# Altium PCB PIC16_SERVO_DS1307_STEP.PcbDoc
Units mm, origin at the board's own origin, x right, y up, seen from the top; angles counter-clockwise.
Board outline 146.43 x 72.77 mm, 2 copper layers (Top Layer, Bottom Layer); 37 components, 35 nets, 160 pads, 34 vias.
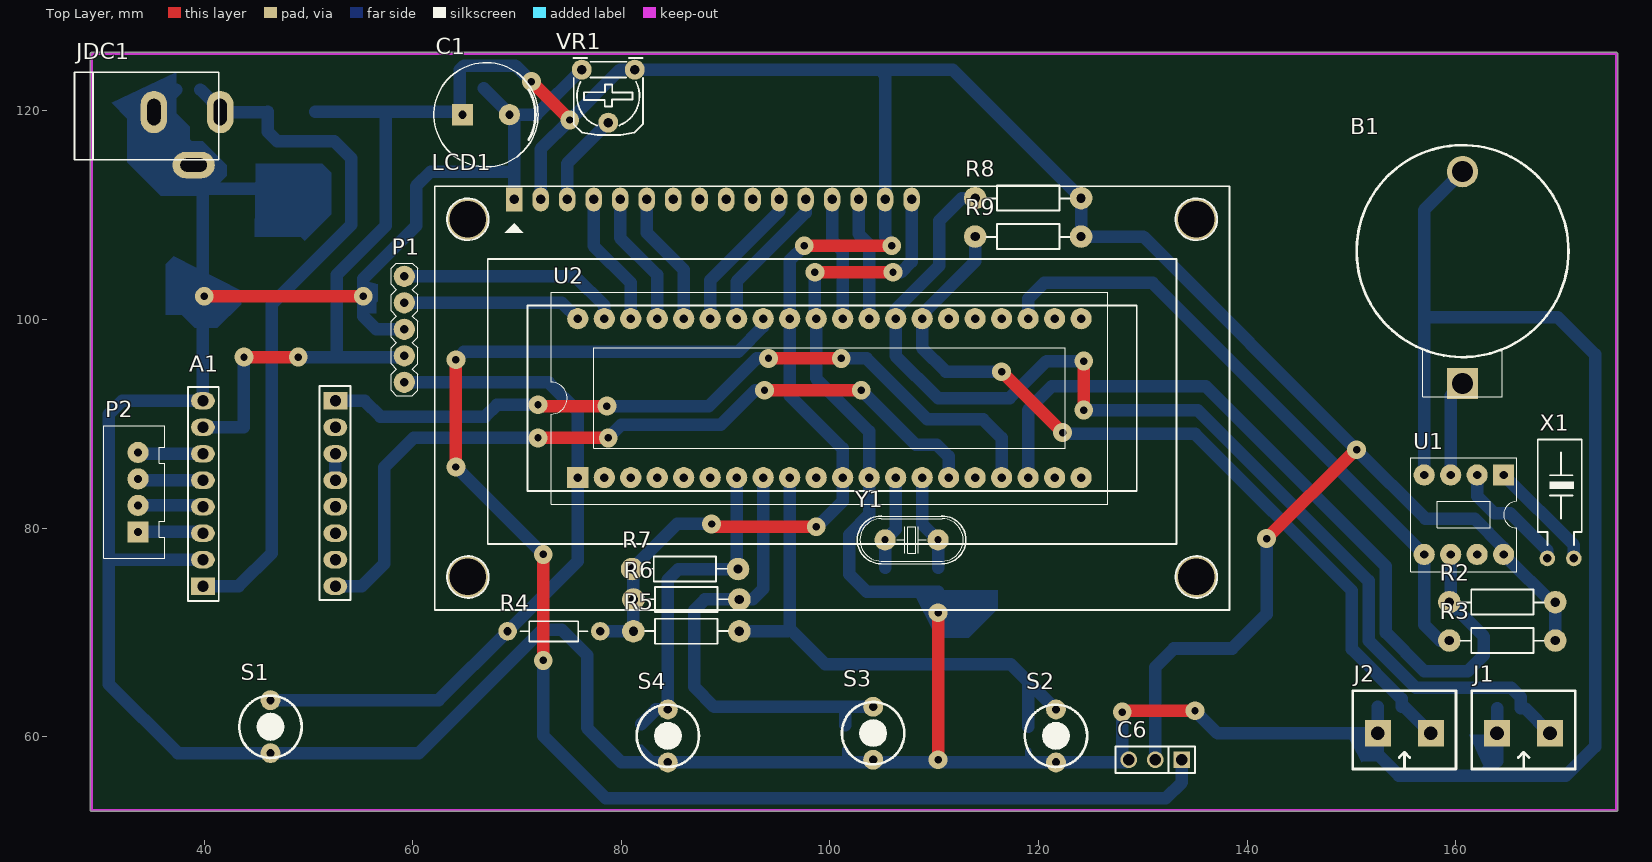
[diagram p0: Top Layer view]
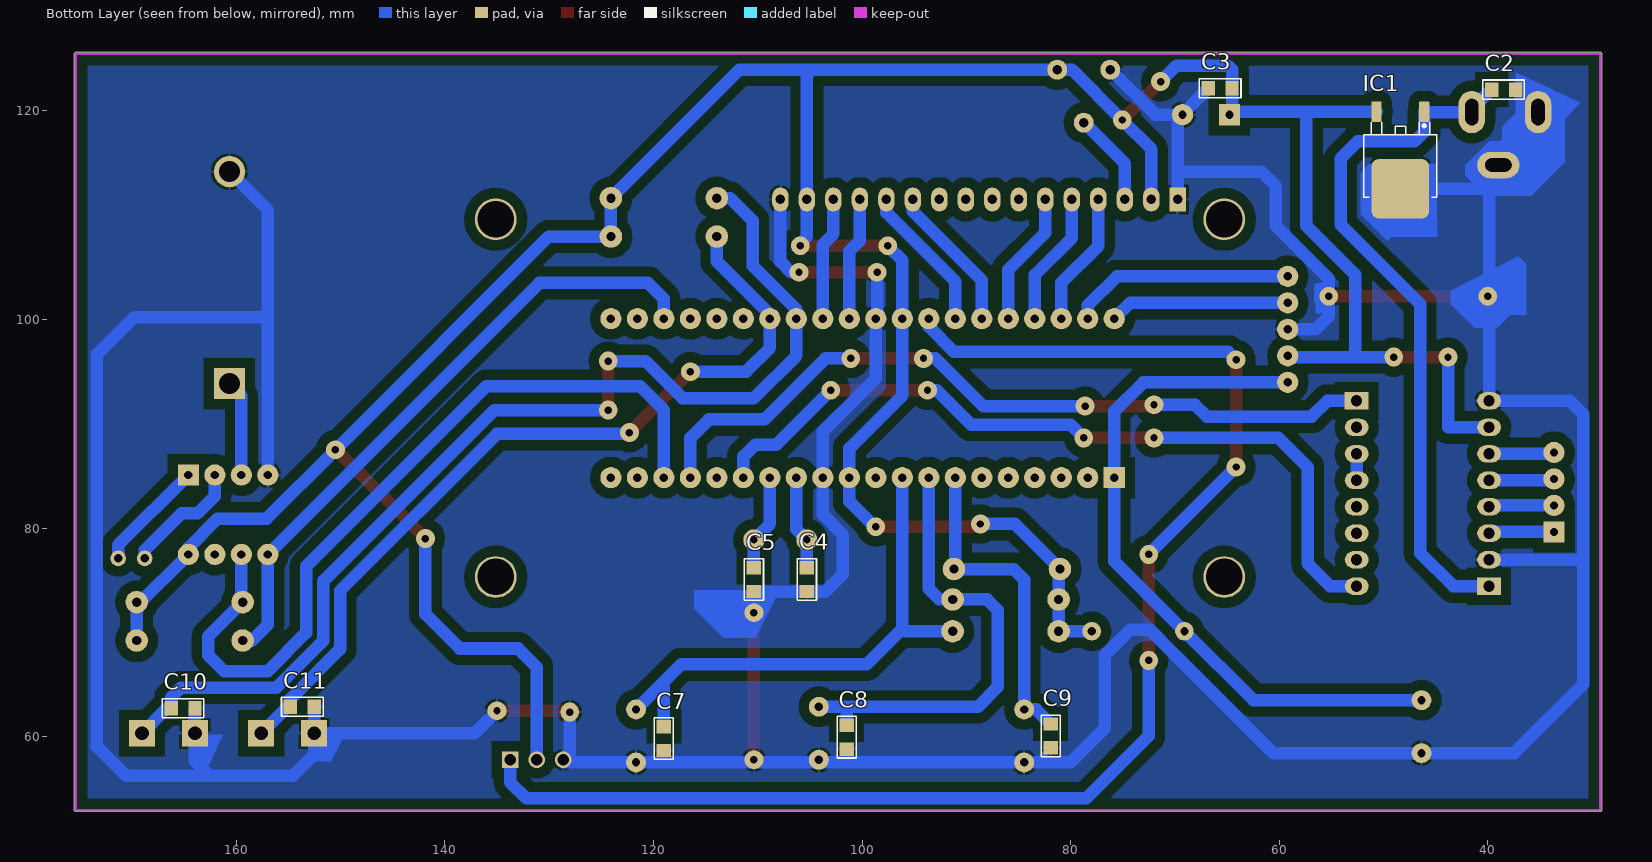
[diagram p1: Bottom Layer view, seen from below]
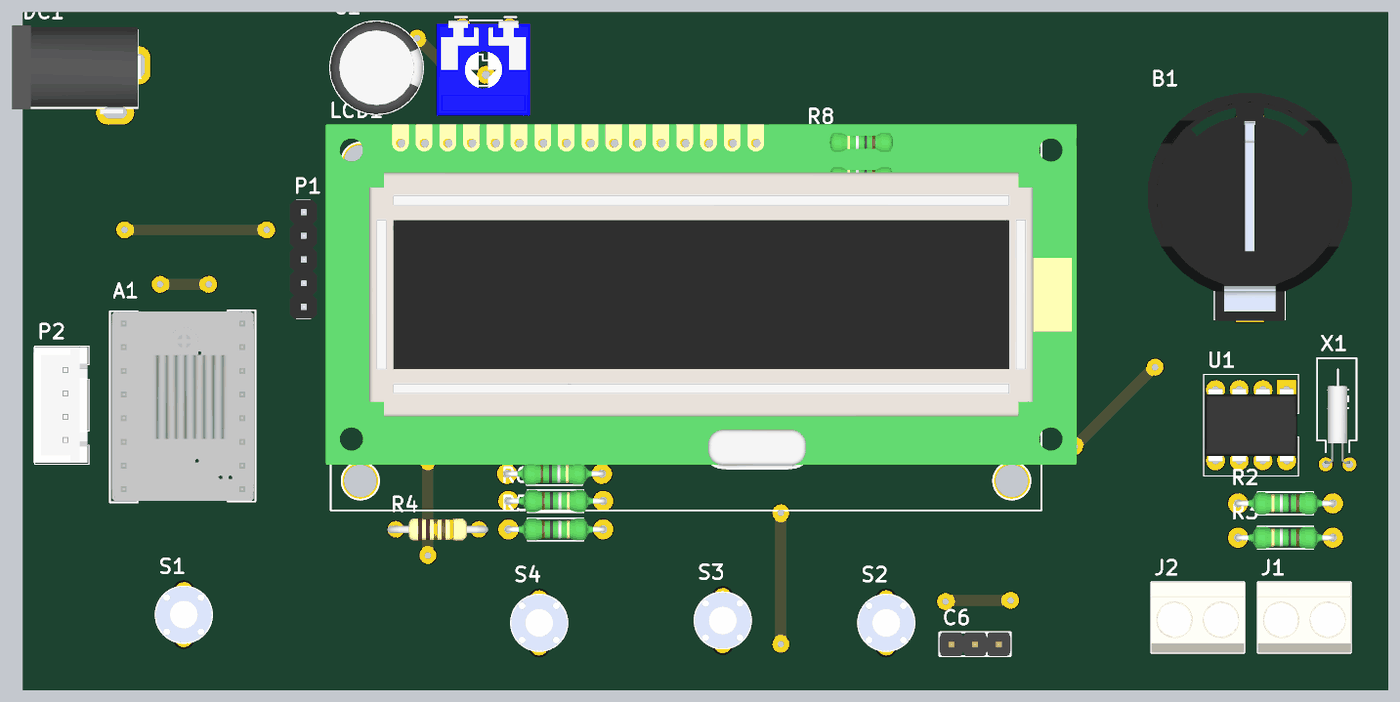
[diagram p2: 3D render of the assembled board from above, using the file's embedded part models]
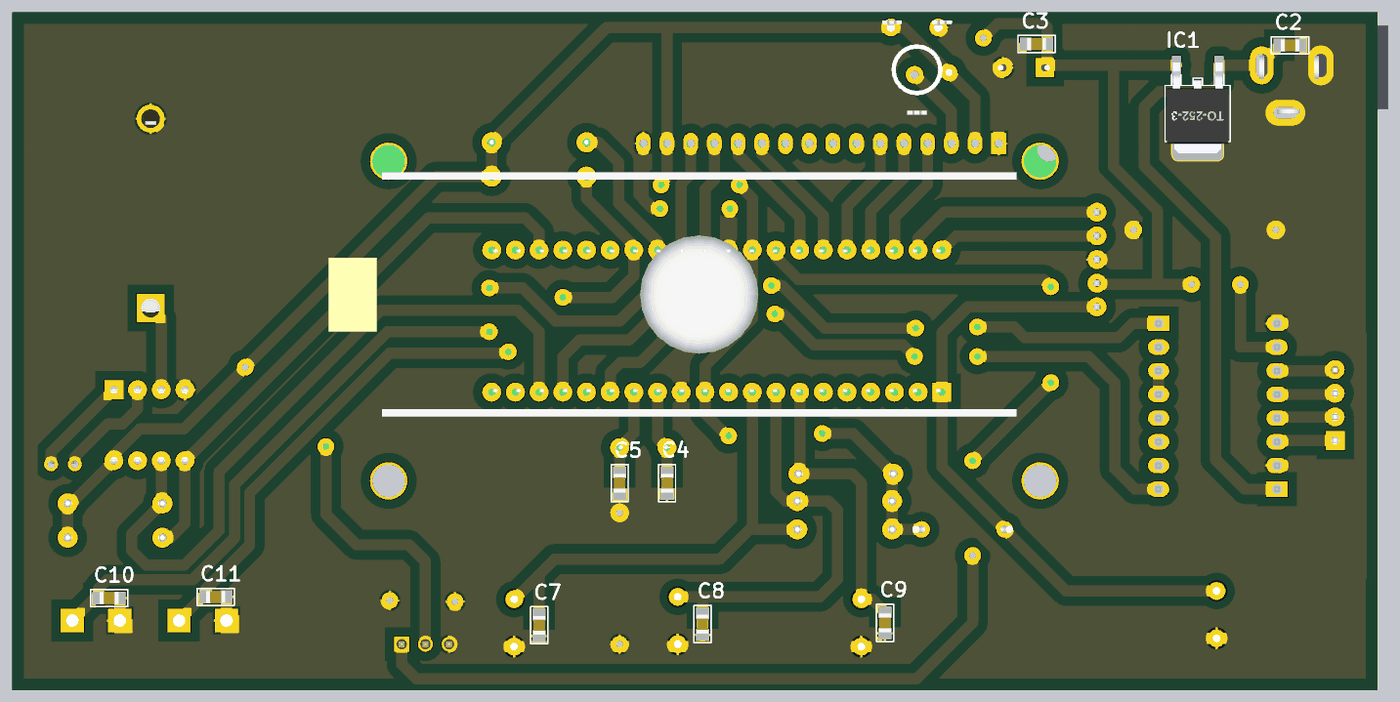
[diagram p3: 3D render of the assembled board from below, using the file's embedded part models]

## Layer stack, top to bottom
Top Solder: solder mask 0.0102, Solder Resist, Dk 3.5
Top Layer: signal copper 0.0356
Dielectric 1: dielectric 0.32, FR-4, Dk 4.8
Bottom Layer: signal copper 0.0356
Bottom Solder: solder mask 0.0102, Solder Resist, Dk 3.5

## Board outline
29.083,52.959 29.083,125.476 cw(c29.21,125.476) 29.21,125.603 175.387,125.603 cw(c175.387,125.476) 175.514,125.476 175.514,52.959 cw(c175.387,52.959) 175.387,52.832 29.21,52.832 cw(c29.21,52.959)

## Design rules (kind name [scope] priority, off if disabled: settings)
Clearance [All] p1: gap=0.25 ignorepadtopadclearanceinfootprint=FALSE
PolygonConnect [All] p1: connectstyle=Relief reliefconductorwidth=0.254 reliefentries=4 polygonreliefangle="90 Angle" airgapwidth=0.254
RoutingVias [All] p1: holewidth=0.711 width=1.8 viastyle="Through Hole" minholewidth=0.711 minwidth=1.8 maxholewidth=0.711 maxwidth=1.8
SolderMaskExpansion [All] p1: expansion=0.102
Width [All] p1: maxlimit=1.2 minlimit=0.4 preferedwidth=0.6
30 further rules are at their usual default settings.

## Components (designator, comment, footprint, x,y, rotation, side; value= is the part's Value field where it differs from the comment)
A1 "A4988" A4988 54.356,74.295 r90 top
B1 "3V3" PIN_CMOS 160.655,106.553 r90 top
C1 "1000uF/25V" "CAP 1000uF/25V" 67.02,119.634 r0 top
C2 "103" SM-0805 38.481,122.047 r180 bottom
C3 "103" SM-0805 65.659,122.174 r0 bottom
C4 "103" SM-0805 105.283,75.057 r270 bottom
C5 "103" SM-0805 110.363,75.057 r270 bottom
C6 "JP3" JP3-D1T 133.731,57.785 r180 top
C7 "103" SM-0805 118.999,59.817 r270 bottom
C8 "103" SM-0805 101.473,59.944 r270 bottom
C9 "103" SM-0805 81.915,60.071 r270 bottom
C10 "103" SM-0805 165.1,62.738 r180 bottom
C11 "103" SM-0805 153.67,62.865 r180 bottom
IC1 "LM78xx" TO252-123 48.387,116.222 r0 bottom
J1 "KF2" KF2-5.08 166.497,60.325 r180 top
J2 "KF2" KF2-5.08 155.067,60.325 r180 top
JDC1 "Jac DC" DC0 38.354,117.348 r0 top
LCD1 "LCD 16x2A" LCD16X2 69.723,111.506 r0 top value=LCD16x2A
P1 "HD5" "JUMP 5" 59.182,104.14 r270 top
P2 "HD4" "HEADER 4" 33.655,79.629 r90 top
R2 "10k" RES-1/4W 164.846,72.771 r0 top
R3 "10k" RES-1/4W 164.846,69.088 r0 top
R4 "1k" R1/4W 77.978,70.104 r180 top value="R1/4W - 1K"
R5 "10k" RES-1/4W 85.852,70.231 r180 top
R6 "10k" RES-1/4W 85.852,73.279 r180 top
R7 "10k" RES-1/4W 85.725,76.2 r180 top
R8 "10k" RES-1/4W 119.38,111.506 r0 top
R9 "10k" RES-1/4W 119.38,107.823 r0 top
S1 "SW" "BUTTON  ROUND" 46.355,60.96 r90 top
S2 "SW" "BUTTON  ROUND" 121.666,60.071 r270 top
S3 "SW" "BUTTON  ROUND" 104.14,60.325 r270 top
S4 "SW" "BUTTON  ROUND" 84.455,60.071 r270 top
U1 "DS1307" "DIP 8" 164.592,85.09 r180 top
U2 "PIC16F877A" "DIP 40" 75.819,84.836 r0 top
VR1 "10K" VR 81.28,123.952 r180 top value="VR 10K"
X1 "32.768k" XT32k 168.783,77.089 r90 top value=4Mhz
Y1 "XTAL" XTAL 107.823,78.867 r0 top

## Footprints (in the part's own frame and the unit in brackets; to place one, negate y for a bottom-side part, rotate by r counter-clockwise, add the part's x,y. Pads: shape width x height; smd on the part's side, far side on the other; paste and mask are expansions set on the pad)
A4988 [mil]
  oval 65x90 hole 42: 1(5,70) 2(105,70) 3(205,70) 4(305,70) 5(405,70) 6(505,70) 7(605,70) 9(705,570) 10(605,570) 11(505,570) 12(405,570) 13(305,570) 14(205,570) 15(105,570)
  rect 65x90 hole 42: 8(705,70) 16(5,570)
  silkscreen extent -51,13 761,627, body extent -45,19 755,619, height 395
"BUTTON  ROUND" [mm]
  round 1.905 / inner round 1.524 / far side round 1.905 hole 0.8 mask+0.205: 1(-2.54,0) 2(2.54,0)
  silkscreen extent -3,-2.99 2.98,2.99, body extent -3,-3 3,3, height 4.5
"CAP 1000uF/25V" [mm]
  rect 2.032x2.032 hole 0.8: 1(-2.25,0)
  round 2.032 hole 0.8: 2(2.25,0)
  silkscreen extent -5,-5 5,5, body extent -5,-5 5.01,5, height 16.01
DC0 [mil] "Jac DC input"
  oval 100x160 hole 50 slot 100 at 90 deg: 1(125,100) 2(-125,100)
  oval 160x100 hole 50 slot 100 at 0 deg: 3(25,-100)
  silkscreen extent -425,-80 120,250, body extent -410,-105 134,269, height 434
"DIP 8" [mil]
  rect 80x80 hole 31.5: 1(0,0)
  round 80 hole 31.5: 2(100,0) 3(200,0) 4(300,0) 5(300,300) 6(200,300) 7(100,300) 8(0,300)
  silkscreen extent -50,-65 350,365, body extent -45,-4 345,304, height 190
"DIP 40" [mil]
  rect 80x80 hole 31.5: 1(0,0)
  round 80 hole 31.5: 2(100,0) 3(200,0) 4(300,0) 5(400,0) 6(500,0) 7(600,0) 8(700,0) 9(800,0) 10(900,0) 11(1000,0) 12(1100,0) 13(1200,0) 14(1300,0) 15(1400,0) 16(1500,0) 17(1600,0) 18(1700,0) 19(1800,0) 20(1900,0) 21(1900,600) 22(1800,600) 23(1700,600) 24(1600,600) 25(1500,600) 26(1400,600) 27(1300,600) 28(1200,600) 29(1100,600) 30(1000,600) 31(900,600) 32(800,600) 33(700,600) 34(600,600) 35(500,600) 36(400,600) 37(300,600) 38(200,600) 39(100,600) 40(0,600)
  silkscreen extent -100,-100 2000,700, body extent -34,0 1934,602, height 227
"HEADER 4" [mil]
  rect 80x80 hole 31.5: 1(0,0)
  round 80 hole 31.5: 2(100,0) 3(200,0) 4(300,0)
  silkscreen extent -100,-100 400,130, body extent -94,-92 394,134, height 276
JP3-D1T [mm] "3 pins, 1 row, straight, gold plating"
  rect 1.6x1.6 hole 1.1: 1(0,0)
  round 1.6 hole 1.1: 2(2.54,0) 3(5.08,0)
  silkscreen extent -1.27,-1.27 6.35,1.27, body extent -1.27,-1.27 6.35,1.27, height 8.54
"JUMP 5" [mil]
  round 80 hole 31.5: 1(0,0) 2(100,0) 3(200,0) 4(300,0) 5(400,0)
  silkscreen extent -50,-50 450,50, body extent -50,-58 450,57, height 335
KF2-5.08 [mm]
  rect 2.5x2.5 hole 1.3: 1(-2.54,0) 2(2.54,0)
  silkscreen extent -4.95,-4.08 4.95,3.43, body extent -5,-4.07 5,3.43, height 10
LCD16X2 [mil] "LCD dipslay 16x2, 16 pin"
  rect 62x90 hole 36: 1(0,0)
  oval 62x90 hole 36: 2(100,0) 3(200,0) 4(300,0) 5(400,0) 6(500,0) 7(600,0) 8(700,0) 9(800,0) 10(900,0) 11(1000,0) 12(1100,0) 13(1200,0) 14(1300,0) 15(1400,0) 16(1500,0)
  round 157.48 hole 137.8: "Hole 0"(-175,-1425) "Hole 0"(-175,-75) "Hole 0"(2575,-1425) "Hole 0"(2575,-75)
  silkscreen extent -300,-1550 2700,50, body extent -321,-1357 2849,81, height 414
PIN_CMOS [mm]
  rect 3x3 hole 2: 1(-12.7,0)
  round 3 hole 2: 2(7.62,0)
  silkscreen extent -13.97,-10.16 10.16,10.16, body extent -14.09,-11 10.41,11, height 8.5
R1/4W [mil] "R 1/4W, 2 Pin, 350mil"
  round 70 hole 31: 1(0,0) 2(350,0)
  silkscreen extent 48,-38 302,38, body extent -40,-47 386,47, height 111
RES-1/4W [mil]
  round 85 hole 35: 1(-215,5) 2(185,5)
  silkscreen extent -173,-42 141,52, body extent -227,-42 197,52, height 95
SM-0805 [mil] "Compoment SMD 80x50mil"
  rect 50x55 smd: 1(-45,0) 2(45,0)
  silkscreen extent -78,-36 78,36, body extent -40,-25 40,25, height 24
TO252-123 [mm]
  round 0.5 on Mech15: 0(0,0)
  rrect25% 1x2 smd: 1(-2.285,-3.7) 3(2.285,-3.7)
  rrect25% 5.5x5.7 smd: 2(0,3.7)
  silkscreen extent -3.5,-2.7 3.5,4.5, body extent -3.3,-3.95 3.3,5.76, height 2.31
VR [mil] "Resistor Variable"
  round 75 hole 35: 1(0,0) 2(100,200) 3(200,0)
  silkscreen extent -31,-44 231,246, body extent -87,-30 307,372, height 165
XT32k [mm] "Crystal 32k, 2 pin, real timer for DS1307"
  round 1.5 hole 0.813: 1(0,0) 2(0,-2.54)
  silkscreen extent 1.27,-3.3 11.4,0.91, body extent 0.07,-2.64 8.45,0.14, height 2.04
XTAL [mil]
  round 80 hole 27.56: 1(-100,0) 2(100,0)
  silkscreen extent -205,-90 205,90, body extent -223,-90 223,93, height 138

## Part data
B1: library part BAT
C1: library part "CAP 1000uF/25V"
C2 C3 C4 C5 C7 C8 C9 C10 C11: library part CM, "Cap SMD"
C6: "WR-PHD 2.54 mm Angled Socket Header", Manufacturer="Würth Elektronik eiSos GmbH", partNo=613003143121, ComponentLink1 Description=Manufacturer, ComponentLink1URL=http://www.we-online.com, ComponentLink2 Description=Datasheet, ComponentLink2URL=http://katalog.we-online.de/em/datasheet/6130xx143121.pdf, Created by="Karrer Zheng", Created Date="29 March 2013", NoPins=03
IC1: "Positive Voltage Regulator", ComponentLink1Description="Manufacturer Link", ComponentLink1URL=http://www.st.com/, ComponentLink2Description=Datasheet, ComponentLink2URL=http://www.st.com/stonline/products/literature/ds/2146/l78m05c.pdf, DatasheetVersion=Apr-1994, LatestRevisionDate=17-Jul-2002, LatestRevisionNote="Re-released for DXP Platform.", Note="Tab is connected to pin 3 (GND).", PackageDescription="TO, Thru-Hole, Vertical, Heatsink Mounted; 3 In-Line Leads; Pitch 2.54 mm; Pin sequence 1, 3, 2", PackageReference=ISOWATT220AB, PackageVersion=Jul-1998, Published=24-Aug-2001, Publisher="Altium Limited"
J1 J2: Manufacturer="Würth Elektronik eiSos GmbH", partNo=691103110002, ComponentLink1 Description=Manufacturer, ComponentLink1URL=http://www.we-online.com, ComponentLink2 Description=Datasheet, ComponentLink2URL=http://katalog.we-online.de/em/datasheet/6911031100xx.pdf, Created by="Karrer Zheng", Created Date="29 October 2013", NoPins=2
JDC1: library part DCIN, "Jac DC input"
LCD1: library part LCD16x2A, "LCD dipslay 16 char, 2 line"
P1: library part "HEADER 5"
P2: library part "HEADER 4"
R2 R3 R5 R6 R7 R8 R9: library part R, "Resistor R1/4W"
R4: library part R1/4W, "Resistor 1/4W"
S1 S2 S3 S4: library part SW-Button, "Switch-Button", LatestRevisionDate=17-Jul-2002, LatestRevisionNote="Re-released for DXP Platform.", PackageReference=SPST-2, Published=24-Mar-1999, Publisher="Altium Limited"
VR1: library part VR1, "Var Resistor"
X1: library part XT2, "Crystal, 32.768 KHz, -40 to 85 degC, 3.2 x 1.5 x 0.9 mm SMD"
Y1: library part XTAL2

## Via types
v1: diameter 1.8, hole 0.711, Top Layer to Bottom Layer, 34 vias

## Nets (pads, with @x,y where several pads share a name; then routed paths per layer and width w, separated by ;. In a path a pad name is that pad's centre, name@x,y a point inside that pad or via, vN(x,y) a via of type N, cw(c..) or ccw(c..) an arc to the next point about the centre after c; other vN are vias at no path point)
12V: A1.16 C2.1 IC1.1 JDC1.1 | length 67.4
  Bottom Layer w1.2: C2.1 41.529,120.142 JDC1.1 46.068,119.888 IC1.1 ; A1.16 43.307,74.422 46.482,77.597 46.482,101.473 54.102,109.093 54.102,115.443 52.451,117.094 46.99,117.094 46.102,117.982 IC1.1 ; IC1.1@46.101,119.923 IC1.1
D4: LCD1.11 U2.35 | length 14.2
  Bottom Layer w1.2: U2.35 88.519,103.759 95.123,110.363 LCD1.11
D5: LCD1.12 U2.34 | length 14.2
  Bottom Layer w1.2: U2.34 91.059,103.632 97.663,110.236 LCD1.12
D6: LCD1.13 U2.30 | length 11.9
  Bottom Layer w1.2: LCD1.13 100.203,107.569 101.219,106.553 U2.30
D7: LCD1.14 U2.29 | length 11.9
  Bottom Layer w1.2: LCD1.14 102.743,108.204 103.759,107.188 U2.29
DIR: A1.8 U2.17 | length 73.9
  Top Layer w1.2: v1(72.009,91.821) 72.136,91.694 v1(78.613,91.694) ; v1(94.107,96.266) v1(101.092,96.266)
  Bottom Layer w1.2: A1.8 55.372,92.202 56.896,90.678 66.929,90.678 68.072,91.821 v1(72.009,91.821) ; v1(78.613,91.694) 88.392,91.694 92.964,96.266 v1(94.107,96.266) ; v1(101.092,96.266) 103.505,96.266 109.347,90.424 114.681,90.424 116.459,88.646 U2.17
DOWN: C7.1 R5.1 S2.1 U2.9 | length 52.5
  Bottom Layer w1.2: R5.1 95.885,70.104 96.139,70.358 ; U2.9 96.139,70.358 ; C7.1 118.999,65.278 ; S2.1 118.999,65.278 ; 96.139,70.358 99.568,66.929 117.348,66.929 118.999,65.278
E0: LCD1.4 U2.38 | length 12.9
  Bottom Layer w1.2: LCD1.4 77.343,107.061 80.899,103.505 U2.38
E1: LCD1.5 U2.37 | length 12.9
  Bottom Layer w1.2: LCD1.5 79.883,107.823 83.439,104.267 U2.37
E2: LCD1.6 U2.36 | length 12.9
  Bottom Layer w1.2: LCD1.6 82.423,108.331 85.979,104.775 U2.36
EN_STEP: A1.1 U2.15 | length 76.7
  Top Layer w1.2: v1(72.009,88.646) v1(78.74,88.646) ; v1(93.726,93.218) v1(102.997,93.218)
  Bottom Layer w1.2: A1.1 55.118,74.422 57.277,76.581 57.277,85.852 60.071,88.646 v1(72.009,88.646) ; v1(78.74,88.646) 80.01,89.916 89.535,89.916 92.837,93.218 v1(93.726,93.218) ; v1(102.997,93.218) 108.204,88.011 110.236,88.011 111.379,86.868 U2.15
GND: A1.9 A1.15 B1.2 C1.2 C2.2 C3.2 C4.2 C5.2 C6.3 C7.2 C8.2 C9.2 C10.2 C11.2 IC1.2 J1.2 J2.2 JDC1.2 JDC1.3 LCD1.1 LCD1.16 P1.3 S1.1 S2.2 S3.2 S4.2 U1.4 U2.12 U2.31 VR1.3 | length 493.9
  Top Layer w1.2: v1(40.005,102.235) v1(55.245,102.235) ; v1(98.552,104.521) v1(106.045,104.521) ; v1(110.363,57.785) v1(110.363,71.882) ; v1(128.016,62.357) 128.143,62.484 v1(135.001,62.484)
  Bottom Layer w0.6: C9.2 83.312,57.531 ; 101.346,57.531 101.473,57.658 C8.2 ; 118.745,57.531 118.999,57.785 C7.2
  Bottom Layer w1.2: C2.2 JDC1.2 39.878,115.189 39.878,112.268 ; A1.15 31.242,76.962 30.861,77.343 ; IC1.2 40.132,112.522 39.878,112.268 ; P1.3 56.515,99.06 55.245,100.33 v1(55.245,102.235) 55.245,103.886 60.325,108.966 60.325,112.776 61.722,114.173 69.723,114.173 ; C3.2 69.27,119.706 C1.2 ; LCD1.1 69.723,114.173 ; VR1.3 71.882,119.634 C1.2 ; v1(98.552,104.521) 98.552,100.203 U2.31 98.679,94.361 103.759,89.281 U2.12 103.759,81.28 101.854,79.375 101.854,75.565 103.505,73.914 C4.2 C5.2 v1(110.363,71.882) ; v1(106.045,104.521) 106.807,104.521 107.823,105.537 LCD1.16 ; v1(128.016,62.357) 128.016,58.42 C6.3 128.397,57.531 S2.2 118.745,57.531 101.346,57.531 S4.2 83.312,57.531 80.01,57.531 76.708,60.833 76.708,67.818 74.295,70.231 72.39,70.231 60.579,58.42 S1.1 37.465,58.42 30.861,65.024 30.861,77.343 ; v1(135.001,62.484) 137.16,60.325 J2.2 ; C11.2 J2.2 ; U1.4 156.972,100.33 ; B1.2 156.972,110.49 156.972,100.33 ; C10.2 J1.2 163.957,57.658 162.56,56.261 ; 30.861,77.343 30.861,90.932 32.131,92.202 A1.9 39.878,112.268 ; C1.2 69.723,119.181 69.723,114.173 ; J2.2 152.527,58.293 154.559,56.261 162.56,56.261 ; 156.972,100.33 157.099,100.203 169.799,100.203 173.355,96.647 173.355,59.055 170.561,56.261 162.56,56.261
MCLR: P1.5 R4.2 S1.2 U2.1 | length 67.1
  Bottom Layer w1.2: S1.2 62.484,63.5 R4.2 75.819,76.835 U2.1 75.819,91.186 73.025,93.98 P1.5
MODE: C9.1 R7.1 S4.1 U2.7 | length 31.5
  Bottom Layer w1.2: C9.1 83.312,62.611 S4.1 84.455,75.057 85.471,76.073 R7.1 91.059,76.2 U2.7
NetA1_5: A1.5 A1.6 | length 2.5
  Bottom Layer w1.2: A1.5 A1.6
NetA1_11: A1.11 P2.4 | length 6.3
  Bottom Layer w1.2: P2.4 33.782,87.122 A1.11
NetA1_12: A1.12 P2.3 | length 6.3
  Bottom Layer w1.2: P2.3 33.782,84.582 A1.12
NetA1_13: A1.13 P2.2 | length 6.3
  Bottom Layer w1.2: P2.2 39.751,82.169 A1.13
NetA1_14: A1.14 P2.1 | length 6.3
  Bottom Layer w1.2: P2.1 39.751,79.629 A1.14
NetB1_1: B1.1 U1.3 | length 9.2
  Bottom Layer w1.2: U1.3 159.512,92.71 B1.1
NetC4_1: C4.1 U2.13 Y1.1 | length 9.1
  Bottom Layer w1.2: C4.1 Y1.1 106.299,79.883 U2.13
NetC5_1: C5.1 U2.14 Y1.2 | length 9.3
  Bottom Layer w1.2: U2.14 108.839,80.391 Y1.2 C5.1
NetLCD1_3: LCD1.3 VR1.2 | length 9
  Bottom Layer w1.2: LCD1.3 74.803,114.935 VR1.2
NetU1_1: U1.1 X1.2 | length 10.8
  Bottom Layer w1.2: U1.1 171.323,78.359 X1.2
NetU1_2: U1.2 X1.1 | length 11.7
  Bottom Layer w1.2: U1.2 162.052,83.058 163.703,81.407 165.227,81.407 168.783,77.851 X1.1
PGC: P1.1 U2.39 | length 21.6
  Bottom Layer w1.2: P1.1 75.565,104.14 78.359,101.346 U2.39
PGD: P1.2 U2.40 | length 17.3
  Bottom Layer w1.2: P1.2 74.295,101.6 U2.40
SCL: R2.1 U1.6 U2.18 | length 77.8
  Bottom Layer w1.2: U2.18 118.999,91.313 121.285,93.599 136.017,93.599 153.289,76.327 153.289,69.977 156.972,66.294 161.163,66.294 162.687,67.818 162.687,69.596 R2.1 159.512,73.025 U1.6
SDA: R3.1 U1.5 U2.23 | length 61.1
  Bottom Layer w1.2: U2.23 118.999,101.981 120.523,103.505 130.937,103.505 U1.5 156.972,70.739 158.496,69.215 R3.1
SERVO: C6.1 U2.33 | length 137.6
  Top Layer w1.2: v1(64.135,85.852) v1(64.135,96.139) ; v1(72.517,67.31) v1(72.517,77.47)
  Bottom Layer w1.2: v1(64.135,85.852) v1(72.517,77.47) ; v1(64.135,96.139) 64.897,96.901 91.186,96.901 93.599,99.314 U2.33 ; v1(72.517,67.31) 72.517,60.071 78.502,54.086 132.191,54.086 133.731,55.626 C6.1
STEP: A1.7
SWITCH_1: C10.1 J1.1 R8.1 U2.28 | length 106.4
  Top Layer w1.2: v1(124.333,91.313) v1(124.333,96.012)
  Bottom Layer w1.2: R8.1 112.649,111.633 110.49,109.474 110.49,105.156 106.299,100.965 U2.28 106.299,96.52 110.363,92.456 117.221,92.456 120.777,96.012 v1(124.333,96.012) ; v1(124.333,91.313) 135.255,91.313 151.638,74.93 151.638,69.215 156.159,64.694 165.303,64.694 166.243,63.754 C10.1 166.624,62.738 J1.1
SWITCH_2: C11.1 J2.1 R9.1 U2.27 | length 80.6
  Top Layer w1.2: v1(116.459,94.996) v1(122.301,89.154)
  Bottom Layer w1.2: R9.1 113.919,105.575 108.839,100.495 U2.27 108.839,97.282 111.125,94.996 v1(116.459,94.996) ; v1(122.301,89.154) 122.428,89.027 135.001,89.027 150.038,73.99 150.038,68.402 154.813,63.627 C11.1 155.067,62.865 J2.1
UP: C8.1 R6.1 S3.1 U2.8 | length 45.2
  Bottom Layer w1.2: U2.8 93.599,74.168 92.583,73.152 R6.1 88.011,73.152 86.995,72.136 86.995,64.77 88.9,62.865 101.6,62.865 ; C8.1 101.473,62.738 101.6,62.865 ; S3.1 101.6,62.865
VCC: A1.10 C1.1 C3.1 C6.2 IC1.3 LCD1.2 LCD1.15 P1.4 R2.2 R3.2 R4.1 R5.2 R6.2 R7.2 R8.2 R9.2 U1.8 U2.11 U2.32 VR1.1 | length 341.4
  Top Layer w1.2: v1(43.815,96.393) v1(49.022,96.393) ; v1(71.374,122.809) v1(75.057,119.126) ; v1(88.646,80.391) 88.9,80.137 v1(98.679,80.137) ; v1(97.536,107.061) v1(105.918,107.061) ; v1(141.859,78.994) 150.368,87.503 v1(150.495,87.503)
  Bottom Layer w1.2: A1.10 43.815,89.662 v1(43.815,96.393) ; v1(49.022,96.393) 52.705,96.393 ; IC1.3 57.404,119.922 ; P1.4 59.055,96.393 52.705,96.393 ; C1.1 C1.1@64.516,119.888 ; v1(71.374,122.809) 69.834,124.349 64.913,124.349 64.516,123.952 C3.1 C1.1@64.516,119.888 ; LCD1.2 72.263,116.332 v1(75.057,119.126) 79.883,123.952 VR1.1 104.775,123.952 ; R4.1 R5.2 R6.2 81.153,75.946 R7.2 85.344,80.391 v1(88.646,80.391) ; v1(97.536,107.061) 96.139,105.664 U2.32 96.139,92.71 101.219,87.63 U2.11 101.219,82.55 98.806,80.137 v1(98.679,80.137) ; v1(105.918,107.061) 105.918,107.292 105.283,107.927 LCD1.15 105.283,123.444 104.775,123.952 ; C6.2 131.191,66.675 132.969,68.453 138.557,68.453 141.859,71.755 v1(141.859,78.994) ; R3.2 169.545,72.517 U1.8 164.592,78.105 161.798,80.899 157.099,80.899 v1(150.495,87.503) 130.048,107.95 R9.2 R8.2 111.76,123.952 104.775,123.952 ; 52.705,96.393 52.705,104.267 57.404,108.966 57.404,119.922 ; 57.404,119.922 64.482,119.922 C1.1@64.516,119.888
pads on no net: "LCD1.Hole 0" A1.2 A1.3 A1.4 IC1.0 LCD1.7 LCD1.8 LCD1.9 LCD1.10 U1.7 U2.2 U2.3 U2.4 U2.5 U2.6 U2.10 U2.16 U2.19 U2.20 U2.21 U2.22 U2.24 U2.25 U2.26

## Polygon pours and split planes (outlines as drawn)
GND on Bottom Layer "Bottom Layer-GND" (solid, pour order 0): 29.21,125.476 29.21,52.959 175.387,52.959 175.26,53.086 175.26,125.476

## Keep-outs
Keep-Out Layer:
  lines w0.254: 29.21,52.959 175.387,52.959 175.387,125.476 29.21,125.476 29.21,52.959

## Other copper
Bottom Layer:
  region net GND: 107.823,74.168 107.95,74.041 116.078,74.041 116.078,72.263 113.284,69.469 110.236,69.469
  region net GND: 161.29,60.198 163.83,60.198 163.83,57.15 162.687,57.15
  region net GND: 149.606,60.198 152.908,60.198 153.035,60.071 152.4,59.436 152.4,57.658 151.13,57.658 151.003,57.531
  region net GND: 55.245,103.759 55.245,100.33 55.499,100.584 56.515,100.584 56.515,101.6 56.642,101.727 56.642,103.378
  region net GND: 37.084,106.045 36.322,105.283 36.322,100.457 37.846,100.457 39.116,99.187 41.275,99.187 43.561,101.473 43.561,102.743
  region net GND: 37.338,123.698 37.338,119.761 38.608,118.491 38.608,117.094 39.878,117.094 42.164,114.808 42.164,113.792 40.259,111.887 35.814,111.887 32.639,115.062 32.639,119.253 31.115,120.777
  region net GND: 44.958,114.935 51.308,114.935 52.197,114.046 52.197,110.109 49.657,107.569 49.276,107.95 44.831,107.95